# EAGLE board TracktorDashDevice (EAGLE 9.6.2)
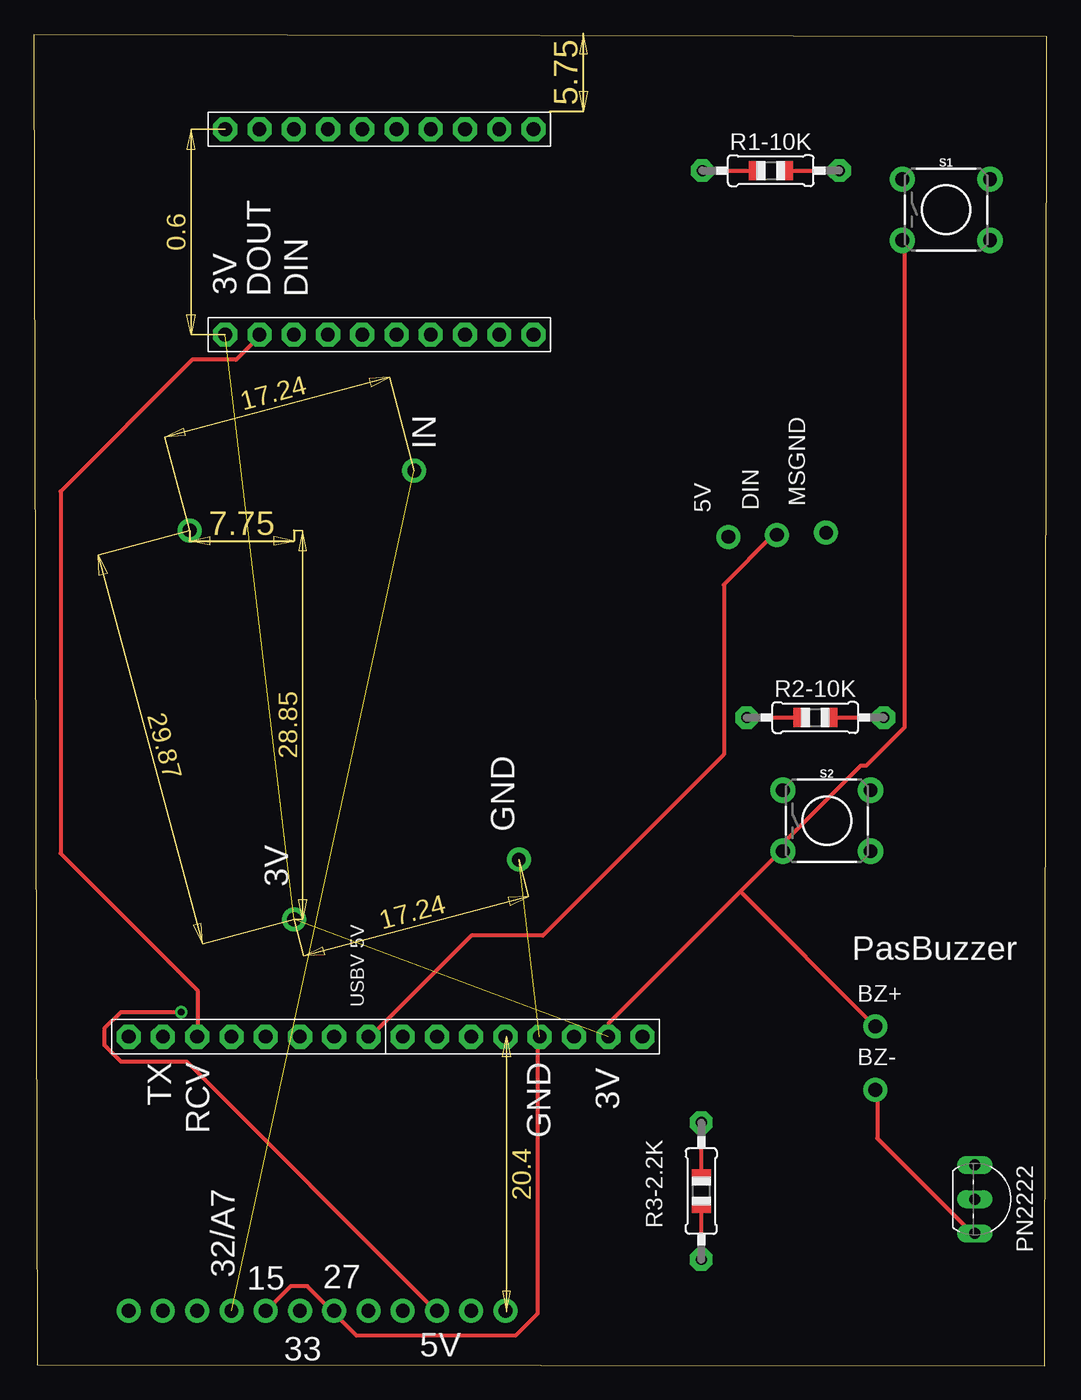
[diagram p0: board, top side]
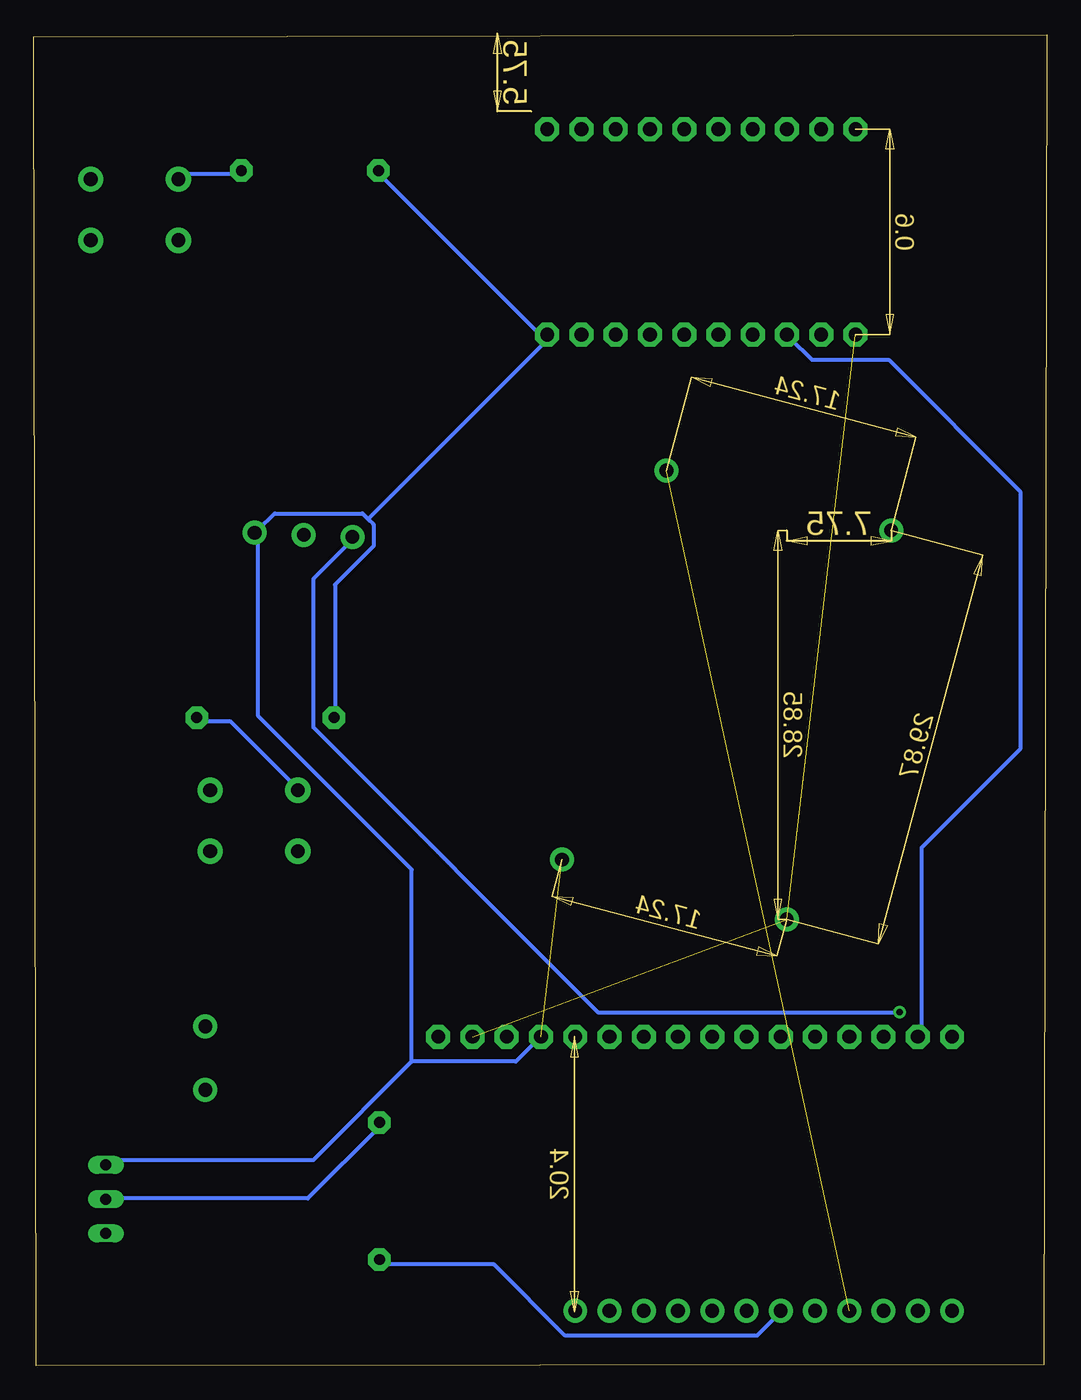
[diagram p1: board, bottom side, seen from below]

Size 75.13 x 98.68 mm. Coordinates in mm from the lower left corner, seen from the top.
Outline: 0.25,0.09 74.96,0 75.13,98.55 0,98.68 0.25,0.09
Copper layers (1*16): Top 0.035mm / dielectric 1.5mm / Bottom 0.035mm
Design rules "default": minimum track width 6mil, minimum drill 0.35mm, track to track 6mil, track to pad 6mil, pad to pad 6mil, via to via 6mil, smd to smd 6mil, copper to edge 40mil, drill to drill 6mil, minimum pad ring 10mil, minimum via ring 8mil, stop-mask expansion 4mil, vias tented up to drill 0mil, thermal gap 10mil
Net classes: 0 default: width 0.305 mm, drill 0.508 mm, clearance 0.508 mm

## Footprints (pad centres in the part's own frame; a part is rotated, then mirrored left to right if it is on the bottom)
1X01-CLEANBIG = drill 1.016 pad 1.778: 1 0,0
1X12-CB = drill 1.016 pad 1.778: 1 -13.97,0; 2 -11.43,0; 3 -8.89,0; 4 -6.35,0; 5 -3.81,0; 6 -1.27,0; 7 1.27,0; 8 3.81,0; 9 6.35,0; 10 8.89,0; 11 11.43,0; 12 13.97,0
1X08-BIG = drill 1.016 pad 1.778 octagon: 1 -8.89,0; 2 -6.35,0; 3 -3.81,0; 4 -1.27,0; 5 1.27,0; 6 3.81,0; 7 6.35,0; 8 8.89,0
TO92-EBC-OVAL = drill 0.813 long: B 0,-1.27; C 2.54,-1.27; E -2.54,-1.27
0805-THM = drill 0.813 pad 1.676 octagon: 1 -5.08,0; 2 5.08,0
TACTILE_SWITCH_PTH_6.0MM_KIT = drill 1.016 pad 1.88: 1 -3.251,2.261; 2 3.251,2.261; 3 -3.251,-2.261; 4 3.251,-2.261
1X10-BIG = drill 1.016 pad 1.778 octagon: 1 -11.43,0; 2 -8.89,0; 3 -6.35,0; 4 -3.81,0; 5 -1.27,0; 6 1.27,0; 7 3.81,0; 8 6.35,0; 9 8.89,0; 10 11.43,0

## Placement (x,y rotation side)
5V  [1X01-CLEANBIG]  51.5,61.46 0 top
BZ+  [1X01-CLEANBIG]  62.4,25.16 0 top
BZ-  [1X01-CLEANBIG]  62.4,20.46 0 top
DIN  [1X01-CLEANBIG]  55.1,61.61 0 top
JP1  [1X01-CLEANBIG]  11.56,61.93 0 top
JP2  [1X01-CLEANBIG]  28.22,66.37 0 top
JP3  [1X01-CLEANBIG]  19.3,33.09 0 top
JP4  [1X01-CLEANBIG]  35.97,37.52 0 top
JP5  [1X12-CB]  21.01,4.08 0 top
JP6  [1X08-BIG]  36.25,24.4 180 top
JP7  [1X08-BIG]  15.93,24.4 180 top
MSGND  [1X01-CLEANBIG]  58.75,61.76 0 top
PN2222  2N2907  [TO92-EBC-OVAL]  71.05,12.36 270 top
R1-10K  10K  [0805-THM]  54.65,88.61 0 top
R2-10K  10K  [0805-THM]  57.95,48.06 0 top
R3-2.2K  [0805-THM]  49.5,12.96 90 top
S1  MOMENTARY-SWITCH-SPST-PTH-6.0MM-KIT  [TACTILE_SWITCH_PTH_6.0MM_KIT]  67.65,85.71 0 top
S2  MOMENTARY-SWITCH-SPST-PTH-6.0MM-KIT  [TACTILE_SWITCH_PTH_6.0MM_KIT]  58.8,40.41 0 top
U$1  PINHD-1X10  [1X10-BIG]  25.63,91.68 180 top
U$2  PINHD-1X10  [1X10-BIG]  25.63,76.44 0 top

## Library data of the parts
5V BZ+ BZ- DIN JP1-JP7 MSGND PN2222 R1-10K R2-10K R3-2.2K U$1 U$2 = adafruit
S1 S2 = SparkFun-Switches; PROD_ID: SWCH-08441; SF_SKU: COM-00097

## Nets
GND: JP4.1 JP5.5 JP5.7 JP6.4 MSGND.1 PN2222.E R1-10K.1 R2-10K.1 U$2.10
N$1: DIN.1 JP7.1
N$2: JP7.7 U$2.3
N$3: JP2.1 JP5.4
N$4: JP5.6 R3-2.2K.1
N$5: JP7.6 U$2.2
N$6: 5V.1 JP5.10
N$7: R1-10K.2 S1.1
N$8: R2-10K.2 S2.1
N$9: BZ-.1 PN2222.C
N$10: PN2222.B R3-2.2K.2
VCC: BZ+.1 JP3.1 JP6.2 S1.3 S2.3 U$2.1

## Tracks (layer width: path | path; a pad name or v marks a point on that pad's centre or on a via)
GND  (1 unrouted)
  Top 0.305: JP5.5 17.43,4.27 19.06,5.9 20.28,5.9 21.9,4.27 JP5.7 22.31,3.86 23.93,2.24 35.72,2.24 37.35,3.86 37.35,24.18 JP6.4
  Bottom 0.305: 50.35,62.79 50.76,63.2 57.26,63.2 58.48,61.98 MSGND.1 58.48,61.57 58.48,48.16 47.1,36.78 47.1,22.56 | 50.35,62.79 49.94,62.39 49.94,60.76 52.79,57.92 52.79,48.16 R2-10K.1 | R1-10K.1 49.54,88.39 37.35,76.2 U$2.10 36.94,76.2 50.35,62.79 | 47.1,22.56 54.41,15.24 69.45,15.24 PN2222.E | 47.1,22.56 39.38,22.56 37.75,24.18 JP6.4
N$1
  Top 0.305: JP7.1 25.15,24.59 32.47,31.91 37.75,31.91 51.16,45.32 51.16,57.92 54.82,61.57 DIN.1
N$2
  Bottom 0.305: JP7.7 9.3,24.59 9.3,38.41 1.99,45.72 1.99,64.82 11.74,74.58 17.43,74.58 19.06,76.2 U$2.3
N$3  (1 unrouted)
N$4
  Bottom 0.305: R3-2.2K.1 49.13,7.52 41,7.52 35.72,2.24 21.5,2.24 19.87,3.86 JP5.6
N$5
  Top 0.305: JP7.6 12.15,24.59 12.15,27.84 1.99,38 1.99,64.82 11.74,74.58 14.99,74.58 16.62,76.2 U$2.2
N$6  (via drill 0.51)
  Top 0.305: v10.93,26.22 6.46,26.22 5.24,25 5.24,23.78 6.46,22.56 11.34,22.56 29.62,4.27 JP5.10
  Bottom 0.305: v10.93,26.22 33.28,26.22 54.41,47.35 54.41,58.32 51.57,61.17 5V.1
N$7
  Bottom 0.305: R1-10K.2 60.1,88.39 63.76,88.39 64.17,87.99 S1.1
N$8
  Bottom 0.305: R2-10K.2 62.95,47.76 60.51,47.76 55.63,42.88 S2.1
N$9
  Top 0.305: PN2222.C 69.45,9.96 62.54,16.87 62.54,20.12 BZ-.1
N$10
  Bottom 0.305: PN2222.B 69.45,12.4 54.82,12.4 49.54,17.68 R3-2.2K.2
VCC  (2 unrouted)
  Top 0.305: 52.38,35.16 55.23,38 S2.3 55.23,38.41 61.32,44.5 61.73,44.5 64.58,47.35 64.58,83.11 S1.3 | 52.38,35.16 42.63,25.4 42.63,24.59 JP6.2 | 52.38,35.16 62.14,25.4 BZ+.1

## Text on the board
tNames: 3V | DOUT | DIN | IN | GND | 3V | PasBuzzer | USBV 5V | TX | 3V | RCV | GND | 32/A7 | 27 | 15 | 33 | 5V